# EAGLE board pyPhotometry_2.0 (EAGLE 6.6.0)
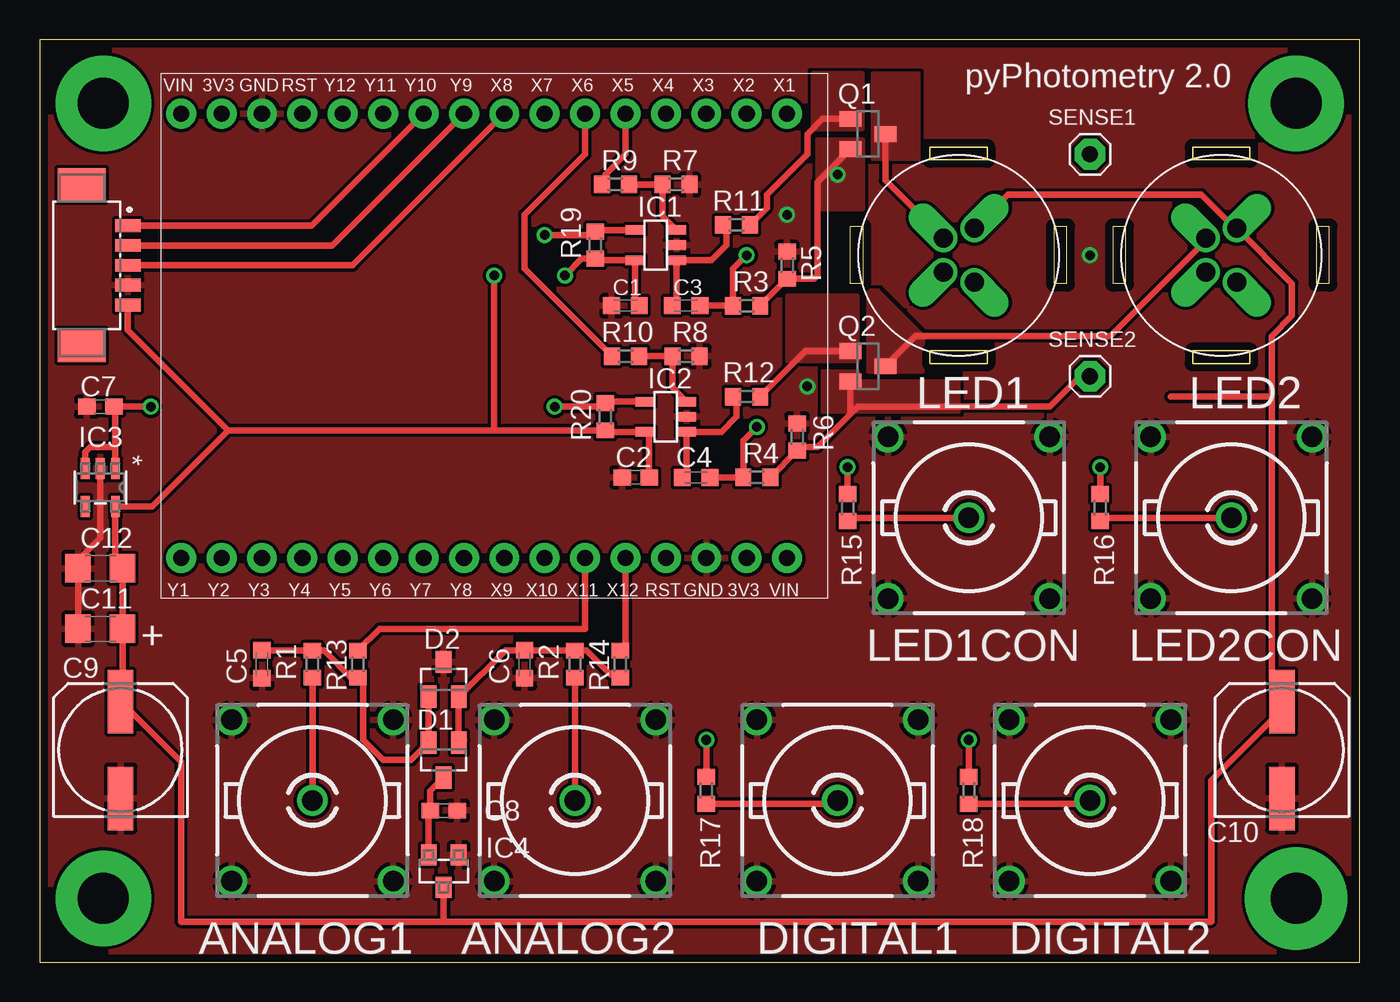
[diagram p0: board, top side]
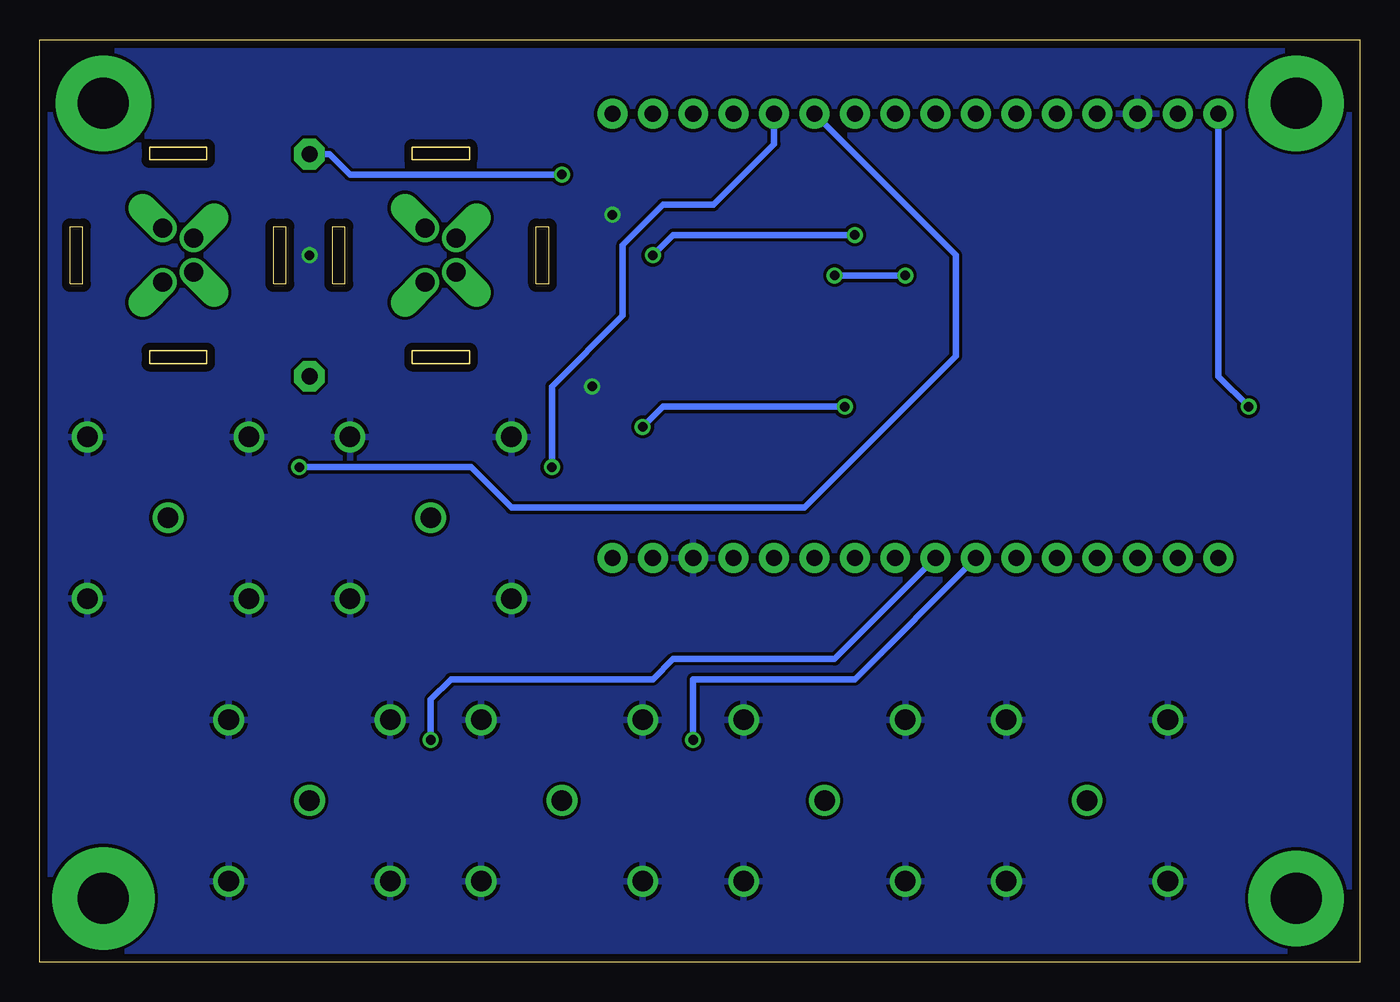
[diagram p1: board, bottom side, seen from below]

Size 83 x 58 mm. Coordinates in mm from the lower left corner, seen from the top.
Outline: 0,0 83,0 83,58 0,58 0,0
Copper layers (1*16): Top 0.035mm / dielectric 1.5mm / Bottom 0.035mm
Design rules "default *": minimum track width 14mil, minimum drill 23mil, track to track 8mil, track to pad 8mil, pad to pad 8mil, via to via 8mil, smd to smd 8mil, copper to edge 20mil, drill to drill 8mil, minimum pad ring 10mil, minimum via ring 8mil, stop-mask expansion 4mil, vias tented up to drill 0mil, thermal gap 10mil

## Footprints (pad centres in the part's own frame; a part is rotated, then mirrored left to right if it is on the bottom)
R141426 = drill 1.295: 1 0,0; 2 5.08,5.08; 3 -5.08,5.08; 4 -5.08,-5.08; 5 5.08,-5.08
C0603K = smd 1.05 x 1.08: 1 -0.875,0; 2 0.875,0
C0603 = smd 1.1 x 1: 1 -0.85,0; 2 0.85,0
153CLV-0807 = smd 4 x 1.6: + 3.05,0; - -3.05,0
C1206 = smd 1.6 x 1.8: 1 -1.4,0; 2 1.4,0
SOT23 = smd 1 x 1.4: 1 -0.95,-1.1; 2 0.95,-1.1; 3 0,1.1
SOT23-5 = smd 0.6 x 1.2: 1 -0.95,-1.306; 2 0,-1.306; 3 0.95,-1.306; 4 0.95,1.306; 5 -0.95,1.306
SOT-23-5_M5 = smd 1.321 x 0.559: 1 -1.194,0.95; 2 -1.194,0; 3 -1.194,-0.95; 4 1.194,-0.95; 5 1.194,0.95
SOT95P237X112-3N = smd 0.991 x 1.321: 1 -0.94,-1.016; 2 0.94,-1.016; 3 0,1.016
M8-4 = drill 1.2 pad 1.6 offset: 1 1.7,-0.975; 2 1.075,0.975; 3 -1.075,0.975; 4 -1.7,-0.975
PB-53261-05 = smd 0.8 x 1.6: 1 -2.5,1.1; 2 -1.25,1.1; 3 0,1.1; 4 1.25,1.1; 5 2.5,1.1 | smd 2.1 x 3: MNT1 -5.05,-1.8; MNT2 5.05,-1.8
R0603 = smd 1 x 1.1: 1 -0.85,0; 2 0.85,0
1X01 = drill 1.016 pad 1.93 octagon: 1 0,0
PYBOARD-REDUCED-3 = drill 1.016 pad 1.88: 3V3_1 2.54,5.08; 3V3_2 30.48,38.1; GND_1 2.54,7.62; GND_6 30.48,35.56; RESET_1 2.54,10.16; RESET_2 30.48,33.02; VIN 2.54,2.54; VIN_5 30.48,40.64; X1 30.48,2.54; X2 30.48,5.08; X3 30.48,7.62; X4 30.48,10.16; X5 30.48,12.7; X6 30.48,15.24; X7 30.48,17.78; X8 30.48,20.32; X9 2.54,20.32; X10 2.54,17.78; X11 2.54,15.24; X12 2.54,12.7; Y1 2.54,40.64; Y2 2.54,38.1; Y3 2.54,35.56; Y4 2.54,33.02; Y5 2.54,30.48; Y6 2.54,27.94; Y7 2.54,25.4; Y8 2.54,22.86; Y9 30.48,22.86; Y10 30.48,25.4; Y11 30.48,27.94; Y12 30.48,30.48

## Placement (x,y rotation side)
ANALOG1  R141426  [R141426]  17.14,10.16 180 top
ANALOG2  R141426  [R141426]  33.66,10.16 180 top
C1  100nF  [C0603K]  36.83,41.27 0 top
C2  100nF  [C0603]  37.47,30.48 0 top
C3  100pF  [C0603K]  40.64,41.27 0 top
C4  100pF  [C0603K]  41.27,30.48 0 top
C5  15nF  [C0603K]  13.97,18.73 270 top
C6  15nF  [C0603K]  30.48,18.73 270 top
C7  1uF  [C0603]  3.81,34.92 0 top
C8  1uF  [C0603]  25.4,9.53 180 top
C9  1000uF  [153CLV-0807]  5.08,13.34 90 top
C10  1000uF  [153CLV-0807]  78.11,13.34 90 top
C11  100uF  [C1206]  3.81,20.95 180 top
C12  10uF  [C1206]  3.81,24.77 180 top
D1  BAT54C  [SOT23]  25.4,12.7 180 top
D2  BAT54A  [SOT23]  25.4,17.78 0 top
DIGITAL1  R141426  [R141426]  50.16,10.16 180 top
DIGITAL2  R141426  [R141426]  66.04,10.16 180 top
IC1  OPA197  [SOT23-5]  38.73,45.09 90 top
IC2  OPA197  [SOT23-5]  39.37,34.29 90 top
IC3  MIC2004-0.5YM5  [SOT-23-5_M5]  3.81,29.84 270 top
IC4  MCP1700T-3302E/TT  [SOT95P237X112-3N]  25.4,5.71 180 top
LED1  M8-4  [M8-4]  57.78,44.45 90 top
LED1CON  R141426  [R141426]  58.42,27.94 0 top
LED2  M8-4  [M8-4]  74.3,44.45 90 top
LED2CON  R141426  [R141426]  74.93,27.94 0 top
PICOBLADE_CON  [PB-53261-05]  4.45,43.81 270 top
Q1  [SOT23]  52.07,52.07 270 top
Q2  [SOT23]  52.07,37.47 270 top
R1  1K  [R0603]  17.14,18.73 270 top
R2  1K  [R0603]  33.66,18.73 270 top
R3  1k  [R0603]  44.45,41.27 180 top
R4  1k  [R0603]  45.09,30.48 180 top
R5  2R  [R0603]  46.99,43.81 270 top
R6  2R  [R0603]  47.62,33.02 270 top
R7  20K  [R0603]  40.01,48.9 180 top
R8  20K  [R0603]  40.64,38.1 180 top
R9  82K  [R0603]  36.2,48.9 180 top
R10  82K  [R0603]  36.83,38.1 180 top
R11  100R  [R0603]  43.81,46.35 180 top
R12  100R  [R0603]  44.45,35.56 180 top
R13  100R  [R0603]  20,18.73 270 top
R14  100R  [R0603]  36.51,18.73 270 top
R15  100R  [R0603]  50.8,28.57 90 top
R16  100R  [R0603]  66.67,28.57 90 top
R17  100R  [R0603]  41.91,10.79 90 top
R18  100R  [R0603]  58.42,10.79 90 top
R19  4M7  [R0603]  34.92,45.09 90 top
R20  4M7  [R0603]  35.56,34.29 90 top
SENSE1  [1X01]  66.04,50.8 0 top
SENSE2  [1X01]  66.04,36.83 0 top
U$1  PYBOARD-REDUCED-3  [PYBOARD-REDUCED-3]  49.53,22.86 90 top

## Library data of the parts
ANALOG1 ANALOG2 DIGITAL1 DIGITAL2 LED1CON LED2CON = con-coax; MF: FARNELL; MPN: R141426161; OC_FARNELL: 4195115; OC_NEWARK: 14J7919
C1-C12 = rcl
D1 D2 = diode
IC1 IC2 = burr-brown
IC3 = MIC2004; MANUFACTURER_PART_NUMBER: MIC20040.5YM5; VENDOR: Micrel
IC4 = LDO_regulators; MPN: MCP1700T-3302E/TT; OC_FARNELL: 1296592; OC_NEWARK: 88H9817; PACKAGE: SOT23-3; SUPPLIER: Microchip
LED1 LED2 = pinhead
PICOBLADE_CON = pel_molex
Q1 Q2 SENSE1 SENSE2 = adafruit
R1-R20 = resistor
U$1 = micropython

## Nets
+3V3: C8.2 D1.3 IC4.2
+5V: C7.2 IC3.1 IC3.3 U$1.VIN_5
A1: ANALOG1.1 R1.2
A2: ANALOG2.1 R2.2
CLAMP1: C5.1 D1.2 D2.1 R1.1 R13.2
CLAMP2: C6.1 D1.1 D2.2 R2.1 R14.2
DIGITAL1: R17.2 U$1.Y7
DIGITAL2: R18.2 U$1.Y8
GND: ANALOG1.2 ANALOG1.3 ANALOG1.4 ANALOG1.5 ANALOG2.2 ANALOG2.3 ANALOG2.4 ANALOG2.5 C1.1 C2.1 C5.2 C6.2 C7.1 C8.1 C9.- C10.- C11.2 C12.2 D2.3 DIGITAL1.2 DIGITAL1.3 DIGITAL1.4 DIGITAL1.5 DIGITAL2.2 DIGITAL2.3 DIGITAL2.4 DIGITAL2.5 IC1.2 IC2.2 IC3.2 IC4.1 LED1CON.2 LED1CON.3 LED1CON.4 LED1CON.5 LED2CON.2 LED2CON.3 LED2CON.4 LED2CON.5 PICOBLADE_CON.4 R5.1 R6.1 R7.1 R8.1 U$1.GND_1 U$1.GND_6
LED1CON: R9.2 R15.2 U$1.X5
LED2CON: R10.2 R16.2 U$1.X6
N$1: C3.1 IC1.1 R11.2
N$2: C3.2 IC1.4 R3.2 R19.2
N$3: IC1.3 R7.2 R9.1
N$7: Q1.1 R11.1
N$8: LED1.2 Q1.3
N$9: Q1.2 R3.1 R5.2 SENSE1.1
N$11: C4.1 IC2.1 R12.2
N$12: Q2.2 R4.1 R6.2 SENSE2.1
N$13: C4.2 IC2.4 R4.2 R20.2
N$14: IC2.3 R8.2 R10.1
N$15: Q2.1 R12.1
N$16: LED2.2 Q2.3
N$17: DIGITAL1.1 R17.1
N$18: LED1CON.1 R15.1
N$19: DIGITAL2.1 R18.1
N$24: LED2CON.1 R16.1
SIGNAL1: R13.1 U$1.X11
SIGNAL2: R14.1 U$1.X12
V+: C1.2 C2.2 C9.+ C10.+ C11.1 C12.1 IC1.5 IC2.5 IC3.5 IC4.3 LED1.1 LED2.1 PICOBLADE_CON.5 R19.1 R20.1
X8: PICOBLADE_CON.3 U$1.X8
Y9: PICOBLADE_CON.2 U$1.Y9
Y10: PICOBLADE_CON.1 U$1.Y10

## Tracks (layer width: path | path; a pad name or v marks a point on that pad's centre or on a via)
+3V3
  Top 0.406: D1.3 24.55,10.75 C8.2 24.46,9.44 IC4.2
+5V  (via drill 0.6)
  Top 0.406: IC3.1 4.76,32.38 | IC3.3 2.86,32.07 3.17,32.38 4.76,32.38 | 4.76,32.38 4.76,34.83 C7.2 v6.99,34.92
  Bottom 0.406: U$1.VIN_5 8.89,36.83 v6.99,34.92
A1
  Top 0.406: ANALOG1.1 R1.2
A2
  Top 0.406: ANALOG2.1 R2.2
CLAMP1
  Top 0.406: C5.1 17.12,19.61 R1.1 17.88,19.58 19.68,17.78 19.9,17.78 R13.2 20.11,17.78 20.32,17.78 20.32,13.97 21.59,12.7 23.35,12.7 D1.2 D2.1
CLAMP2
  Top 0.406: R14.2 36.3,18.1 35.88,18.1 34.39,19.58 R2.1 33.63,19.61 C6.1 29.28,19.61 D2.2 D1.1 26.5,13.8 26.67,13.97
DIGITAL1  (via drill 0.6)
  Top 0.406: v41.91,13.97 R17.2
  Bottom 0.406: U$1.Y7 31.75,17.78 41.91,17.78 v41.91,13.97
DIGITAL2  (via drill 0.6)
  Top 0.406: v58.42,13.97 R18.2
  Bottom 0.406: U$1.Y8 33.02,19.05 43.18,19.05 44.45,17.78 57.15,17.78 58.42,16.51 v58.42,13.97
GND  (via drill 0.6)
  Top 0.406: C11.2 C12.2 2.54,24.89 2.54,25.4 3.81,26.67 IC3.2
  other vias: 48.26,36.2 46.99,46.99 66.04,44.45
  pour Bottom: 0,0 0,57.78 82.87,57.78 82.87,0
  pour Top (rank 2): 0,0 0,57.78 82.87,57.78 82.87,0
LED1CON  (via drill 0.6)
  Top 0.406: U$1.X5 36.83,50.8 35.56,49.53 35.56,49.11 R9.2 | R15.2 v50.8,31.11
  Bottom 0.406: v50.8,31.11 50.8,36.2 46.35,40.64 46.35,45.09 43.81,47.62 40.64,47.62 36.83,51.44 U$1.X5
LED2CON  (via drill 0.6)
  Top 0.406: U$1.X6 34.29,50.8 30.48,46.99 30.48,43.6 R10.2 | R16.2 v66.67,31.11
  Bottom 0.406: v66.67,31.11 55.88,31.11 53.34,28.57 34.92,28.57 25.4,38.1 25.4,44.45 U$1.X6
N$1
  Top 0.406: C3.1 40.04,41.27 IC1.1 42.23,44.13 43.18,45.09 43.18,46.14 R11.2
N$2  (via drill 0.6)
  Top 0.406: C3.2 R3.2 43.6,43.6 v44.45,44.45 | IC1.4 34.92,46.03 R19.2 34.71,45.72 v31.75,45.72
  Bottom 0.406: v31.75,45.72 43.18,45.72 v44.45,44.45
N$3
  Top 0.406: IC1.3 39.16,46.92 R7.2 R9.1
N$4  (via drill 3.2 pad 6)
  other vias: 4,54
N$5  (via drill 3.2 pad 6)
  other vias: 4,4
N$6  (via drill 3.2 pad 6.45)
  other vias: 79,4
N$7
  Top 0.406: 44.34,46.67 R11.1 | 44.98,46.67 R11.1 | Q1.1 50.48,53.02 49.21,53.02 48.26,52.07 48.26,50.8 45.72,48.26 45.72,47.41 R11.1
  pour Top (no thermals): 51.75,52.39 51.75,55.88 48.58,55.88 48.58,52.39
N$8
  Top 0.406: Q1.3 53.17,49.16 LED1.2
  pour Top (no thermals): 55.24,50.48 52.39,50.48 52.39,55.88 55.24,55.88
N$9  (via drill 0.6)
  Top 0.406: R3.1 R5.2 48.68,42.97 48.9,43.18 48.9,49.05 Q1.2
  Bottom 0.406: SENSE1.1 64.77,50.8 63.5,49.53 v50.16,49.53
  pour Top (no thermals): 51.75,51.75 51.75,47.31 48.9,47.31 48.9,51.75
N$10  (via drill 3.2 pad 6)
  other vias: 79,54
N$11
  Top 0.406: C4.1 40.68,30.76 IC2.1 42.87,33.34 43.81,34.29 43.81,35.34 R12.2
N$12
  Top 0.406: R4.1 R6.2 47.84,32.38 48.9,32.38 50.97,34.46 | Q2.2 50.97,34.46 | SENSE2.1 65.41,36.83 63.5,34.92 51.44,34.92 50.97,34.46
  pour Top (no thermals): 51.44,37.15 49.21,37.15 49.21,34.61 57.78,34.61 57.78,36.51 51.44,36.51
N$13  (via drill 0.6)
  Top 0.406: IC2.4 35.66,35.24 R20.2 35.34,34.92 v32.38,34.92 | 42.15,30.72 C4.2 R4.2 44.23,32.8 v45.09,33.66
  Bottom 0.406: v32.38,34.92 43.81,34.92 v45.09,33.66
N$14
  Top 0.406: IC2.3 39.79,36.13 R8.2 R10.1
N$15
  Top 0.406: 45.62,35.88 R12.1 48.16,38.41 Q2.1
  pour Top (no thermals): 51.44,37.78 51.44,41.91 46.99,41.91 46.99,37.78
N$16
  Top 0.406: LED2.2 73.32,45.38 67.31,39.37 55.08,39.37 Q2.3
  pour Top (no thermals): 52.07,37.15 55.56,37.15 55.56,39.37 52.7,42.23 52.07,42.23
N$17
  Top 0.406: DIGITAL1.1 49.95,9.95 R17.1
N$18
  Top 0.406: LED1CON.1 51.02,27.94 R15.1
N$19
  Top 0.406: DIGITAL2.1 65.83,9.95 R18.1
N$24
  Top 0.406: LED2CON.1 66.89,27.94 R16.1
SIGNAL1
  Top 0.406: U$1.X11 34.29,20.95 21.38,20.95 R13.1
SIGNAL2
  Top 0.406: U$1.X12 36.83,19.9 R14.1
V+  (via drill 0.6)
  Top 0.406: 25.4,2.54 8.89,2.54 8.89,12.57 C9.+ 5.21,16.52 C11.1 C12.1 4.76,25.21 IC3.5 7.06,28.65 11.85,33.44 | 25.4,2.54 73.66,2.54 73.66,11.43 77.47,15.24 C10.+ 78.11,17.78 77.47,17.78 77.47,35.56 | C2.2 38.31,33.09 IC2.5 35.66,33.34 R20.1 28.57,33.44 | C1.2 37.43,41.27 IC1.5 34.92,44.13 R19.1 34.08,44.23 v33.02,43.18 | IC4.3 25.4,2.54 | 77.47,35.56 77.47,39.37 78.74,40.64 78.74,42.68 LED2.1 75.27,46.02 73.03,48.26 60.87,48.26 LED1.1 | 71.12,35.56 77.47,35.56 | 28.57,33.44 11.85,33.44 | v28.57,43.18 28.57,33.44 | PICOBLADE_CON.5 5.54,39.74 11.85,33.44
  Bottom 0.406: v33.02,43.18 v28.57,43.18
X8
  Top 0.406: PICOBLADE_CON.3 19.68,43.81 U$1.X8
Y9
  Top 0.406: PICOBLADE_CON.2 18.39,45.06 U$1.Y9
Y10
  Top 0.406: PICOBLADE_CON.1 17.11,46.31 U$1.Y10

## Text on the board
tPlace: +
tNames: pyPhotometry 2.0
tDocu: Licensed under the TAPR Open Hardware License / (www.tapr.org/OHL) / Copyright 2024 Thomas Akam